# Altium PCB PCB1.PcbDoc
Units mil, origin at the board's own origin, x right, y up, seen from the top; angles counter-clockwise.
Board outline 6000 x 4000 mil, 2 copper layers (Top Layer, Bottom Layer); 60 components, 38 nets, 155 pads, 0 vias.
Unrouted connection lines stored in the file: 1.
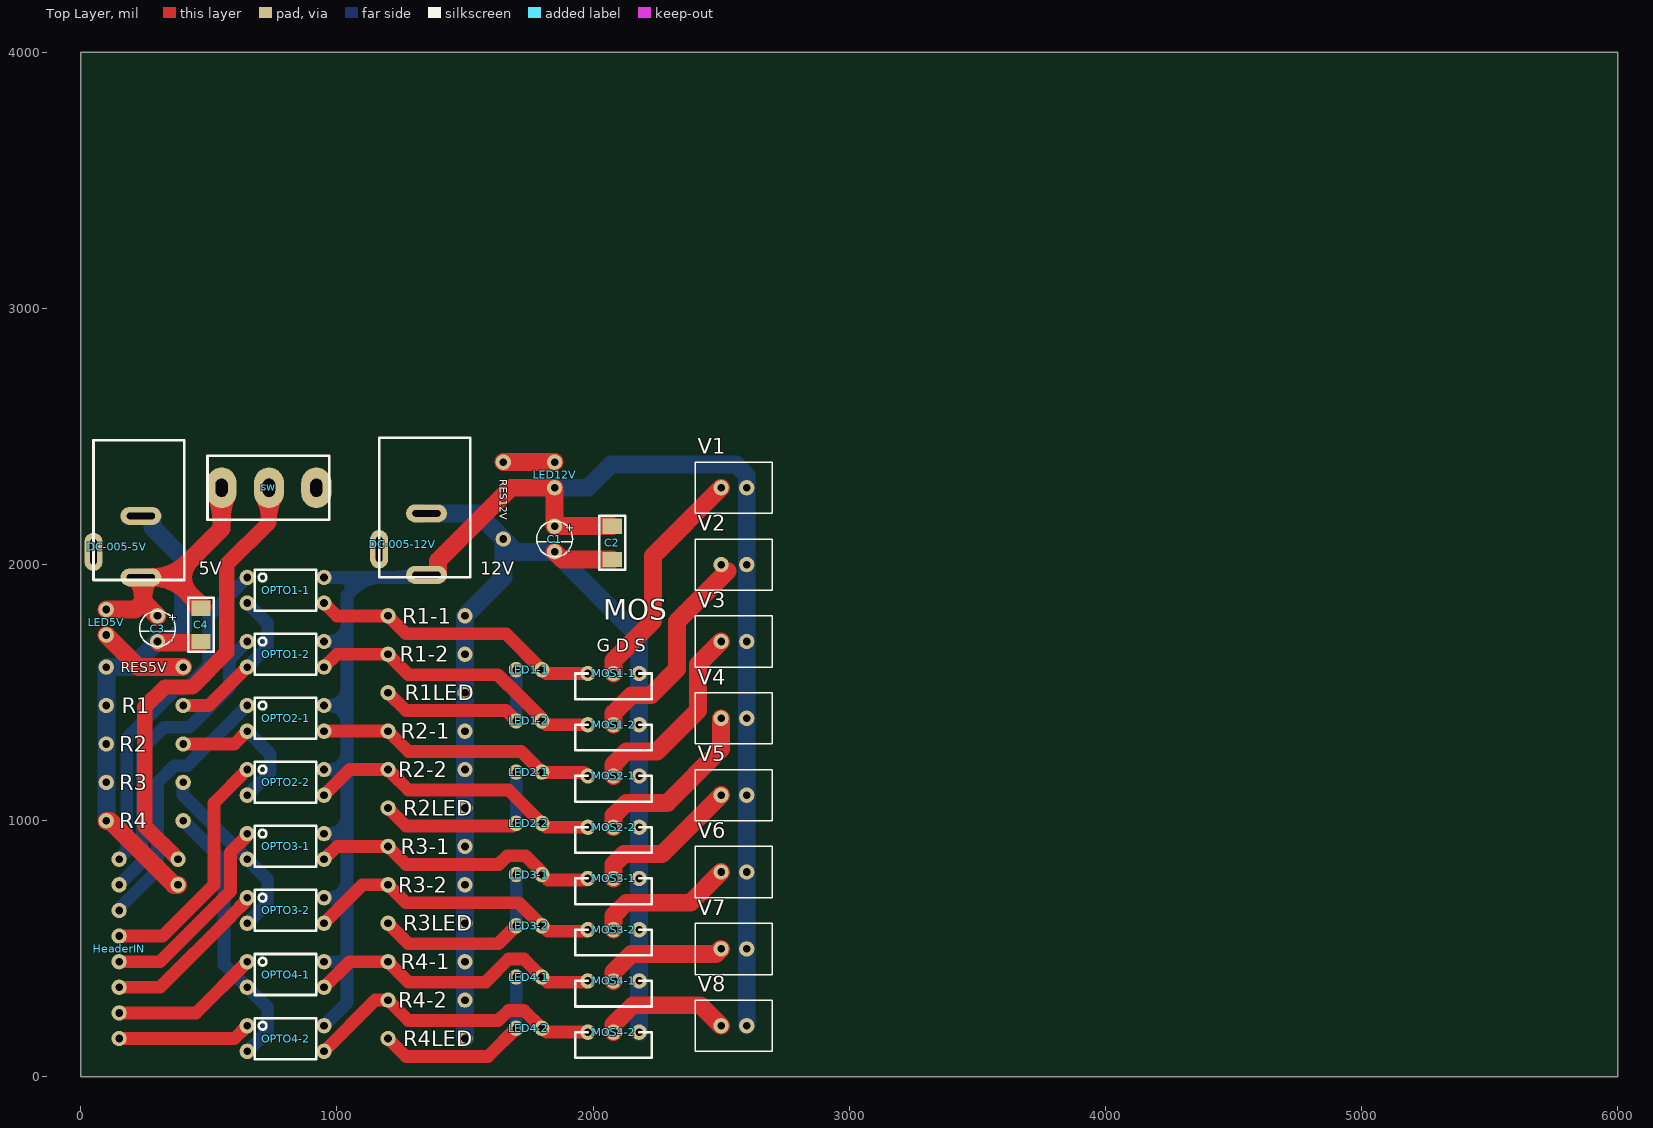
[diagram p0: Top Layer view]
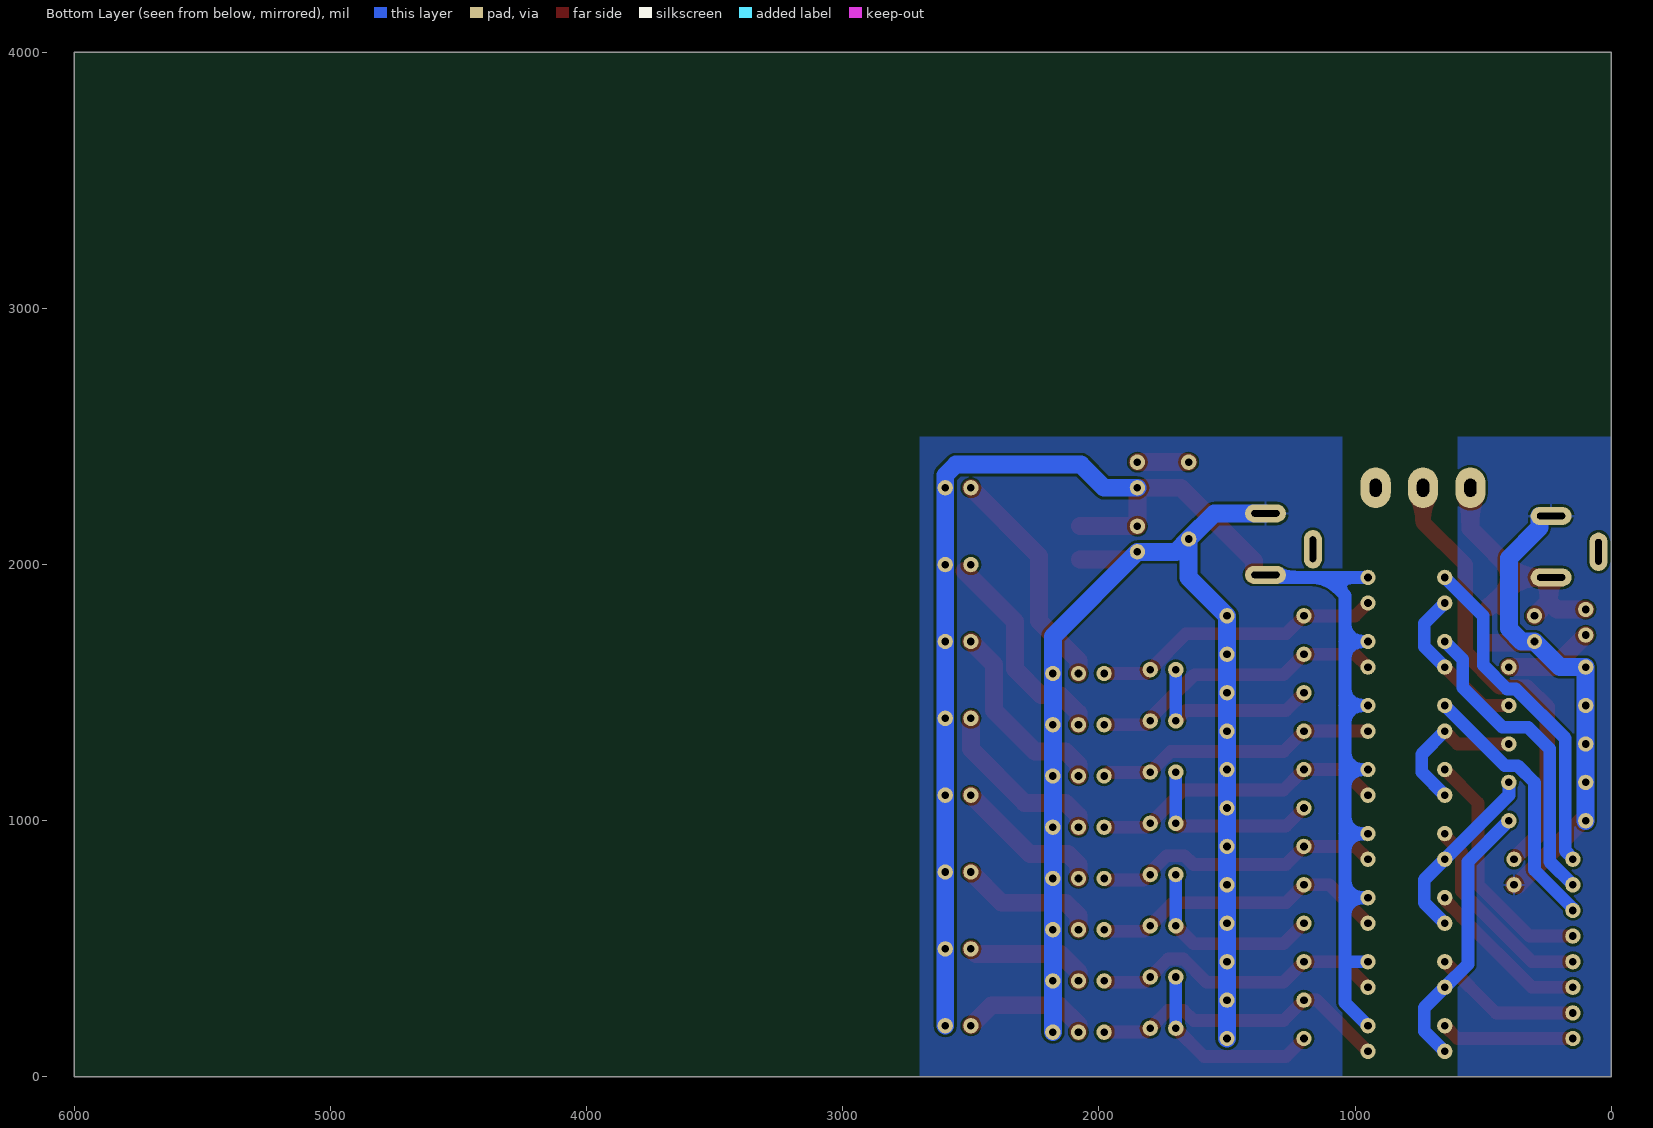
[diagram p1: Bottom Layer view, seen from below]

## Layer stack, top to bottom
Top Solder: solder mask 0.4, Solder Resist, Dk 3.5
Top Layer: signal copper 1.4
Dielectric 1: dielectric 12.6, FR-4, Dk 4.8
Bottom Layer: signal copper 1.4
Bottom Solder: solder mask 0.4, Solder Resist, Dk 3.5

## Board outline
0,0 6000,0 6000,4000 0,4000

## Design rules (kind name [scope] priority, off if disabled: settings)
Clearance [All] p1: gap=10 ignorepadtopadclearanceinfootprint=FALSE except(0: Arc-Hole Track-Hole SMDPad-Hole THPad-Hole Via-Hole Fill-Hole Poly-Hole Region-Hole Text-Hole)
PolygonConnect [All] p1: connectstyle=Relief reliefconductorwidth=10 reliefentries=4 polygonreliefangle="90 Angle" airgapwidth=10
RoutingVias [All] p1: holewidth=28 width=50 viastyle="Through Hole" minholewidth=28 minwidth=50 maxholewidth=28 maxwidth=50
SolderMaskExpansion [All] p1: expansion=4 istentingtop=FALSE
Width [All] p1: maxlimit=100 minlimit=10 preferedwidth=50 minimp=50.000000 maximp=50.000000 favimp=50.000000
30 further rules are at their usual default settings.

## Components (designator, comment, footprint, x,y, rotation, side; value= is the part's Value field where it differs from the comment)
C1 "C-po" CAP1 1850,2150 r270 top
C2 "C" CAP2 2125,2190 r270 top
C3 "C-po" CAP1 300,1800 r270 top
C4 "C" CAP2 520,1870 r270 top
DC-005-5V "电源插头" DC-005 50,2485 r270 top
DC-005-12V "电源插头" DC-005 1165,2495 r270 top
HeaderIN "Header" HEADER 150,850 r0 top
LED1-1 "LED" LED 1800,1590 r180 top
LED1-2 "LED" LED 1800,1390 r180 top
LED2-1 "LED" LED 1800,1190 r180 top
LED2-2 "LED" LED 1800,990 r180 top
LED3-1 "LED" LED 1800,790 r180 top
LED3-2 "LED" LED 1800,590 r180 top
LED4-1 "LED" LED 1800,390 r180 top
LED4-2 "LED" LED 1800,190 r180 top
LED5V "LED" LED 100,1825 r270 top
LED12V "LED" LED 1850,2300 r90 top
MOS1-1 "IRF3205" MOS 1980,1575 r0 top
MOS1-2 "IRF3205" MOS 1980,1375 r0 top
MOS2-1 "IRF3205" MOS 1980,1175 r0 top
MOS2-2 "IRF3205" MOS 1980,975 r0 top
MOS3-1 "IRF3205" MOS 1980,775 r0 top
MOS3-2 "IRF3205" MOS 1980,575 r0 top
MOS4-1 "IRF3205" MOS 1980,375 r0 top
MOS4-2 "IRF3205" MOS 1980,175 r0 top
OPTO1-1 "PC817" PC817 650,1950 r0 top
OPTO1-2 "PC817" PC817 650,1700 r0 top
OPTO2-1 "PC817" PC817 650,1450 r0 top
OPTO2-2 "PC817" PC817 650,1200 r0 top
OPTO3-1 "PC817" PC817 650,950 r0 top
OPTO3-2 "PC817" PC817 650,700 r0 top
OPTO4-1 "PC817" PC817 650,450 r0 top
OPTO4-2 "PC817" PC817 650,200 r0 top
R1 "RES" RES 100,1450 r0 top
R1-1 "RES" RES 1200,1800 r0 top
R1-2 "RES" RES 1200,1650 r0 top
R1LED "RES" RES 1200,1500 r0 top
R2 "RES" RES 100,1300 r0 top
R2-1 "RES" RES 1200,1350 r0 top
R2-2 "RES" RES 1200,1200 r0 top
R2LED "RES" RES 1200,1050 r0 top
R3 "RES" RES 100,1150 r0 top
R3-1 "RES" RES 1200,900 r0 top
R3-2 "RES" RES 1200,750 r0 top
R3LED "RES" RES 1200,600 r0 top
R4 "RES" RES 100,1000 r0 top
R4-1 "RES" RES 1200,450 r0 top
R4-2 "RES" RES 1200,300 r0 top
R4LED "RES" RES 1200,150 r0 top
RES5V "RES" RES 400,1600 r180 top
RES12V "RES" RES 1650,2400 r270 top
sw "powSwitch" POWSWITCH 920,2300 r90 top
V1 "ValveHeader" VALVEHEADER 2600,2300 r180 top
V2 "ValveHeader" VALVEHEADER 2600,2000 r180 top
V3 "ValveHeader" VALVEHEADER 2600,1700 r180 top
V4 "ValveHeader" VALVEHEADER 2600,1400 r180 top
V5 "ValveHeader" VALVEHEADER 2600,1100 r180 top
V6 "ValveHeader" VALVEHEADER 2600,800 r180 top
V7 "ValveHeader" VALVEHEADER 2600,500 r180 top
V8 "ValveHeader" VALVEHEADER 2600,200 r180 top

## Footprints (in the part's own frame and the unit in brackets; to place one, negate y for a bottom-side part, rotate by r counter-clockwise, add the part's x,y. Pads: shape width x height; smd on the part's side, far side on the other; paste and mask are expansions set on the pad)
CAP1 [mil]
  round 60 hole 30: C+(0,0) C-(100,0)
  silkscreen extent -20,-70 120,70
CAP2 [mil]
  rect 60x75 smd: C1(40,-50) C2(170,-50)
  silkscreen extent 0,-100 210,0
DC-005 [mil] "电源插头"
  oval 150x70 hole 25 slot 100 at 0 deg: none(435,0)
  oval 70x160 hole 25 slot 110 at 90 deg: V+(535,185) V-(295,185)
  silkscreen extent 0,0 545,355
HEADER [mil]
  round 60 hole 30: 1(0,0) 2(0,-100) 3(0,-200) 4(0,-300) 5(0,-400) 6(0,-500) 7(0,-600) 8(0,-700)
LED [mil]
  round 60 hole 30: 1(0,0) 2(100,0)
MOS [mil]
  round 60 hole 30: D(100,0) G(0,0) S(200,0)
  silkscreen extent -50,-100 250,0
PC817 [mil]
  round 60 hole 30: 1(0,0) 2(0,-100) 3(300,0) 4(300,-100)
  silkscreen extent 30,-130 270,30
POWSWITCH [mm]
  oval 4x3 hole 1.2 slot 1.8 at 0 deg: IN+(0,9.398) IN-(0,4.699) none(0,0)
  silkscreen extent -3.18,-1.27 3.17,10.79
RES [mil]
  round 60 hole 30: R1(0,0) R2(300,0)
VALVEHEADER [mil]
  round 60 hole 30: +(0,0) -(100,0)
  silkscreen extent -100,-100 200,100

## Part data
DC-005-5V DC-005-12V: library part DC-005

## Free pads (board coordinates)
  round 60 hole 30: 2(380,850) 3(380,750)

## Nets (pads, with @x,y where several pads share a name; then routed paths per layer and width w, separated by ;. In a path a pad name is that pad's centre, name@x,y a point inside that pad or via, vN(x,y) a via of type N, cw(c..) or ccw(c..) an arc to the next point about the centre after c; other vN are vias at no path point)
+5: pad.2 sw.IN- | length 1767.5
  Top Layer w60: pad.2 250,980 250,1444 328.5,1522.5 435.64,1522.5 570,1656.86 570,2000 735,2165 sw.IN-
+12: C1.C+ C2.C1 DC-005-12V.V+ LED12V.1 OPTO1-1.3 OPTO1-2.3 OPTO2-1.3 OPTO2-2.3 OPTO3-1.3 OPTO3-2.3 OPTO4-1.3 OPTO4-2.3 V1.+ V2.+ V3.+ V4.+ V5.+ V6.+ V7.+ V8.+ | length 6751.7
  Top Layer w70: DC-005-12V.V+ 1395,1960 1395,2015 1680,2300 LED12V.1 C1.C+ C2.C1
  Bottom Layer w50: OPTO4-2.3 1040,290 1040,700 ; OPTO4-1.3 1030,450 ; OPTO3-2.3 1040,700 ; OPTO3-1.3 1040,950 ; OPTO2-2.3 1040,1200 ; OPTO2-1.3 1040,1450 ; OPTO1-2.3 1040,1700 ; OPTO1-1.3 1110,1950 ; DC-005-12V.V+ 1299.59,1960 1289.59,1950 1110,1950 ; 1040,700 1040,950 ; 1040,950 1040,1200 ; 1040,1200 1040,1450 ; 1040,1450 1040,1700 ; 1040,1700 1040,1880 1110,1950
  Bottom Layer w70: LED12V.1 1980,2300 2070,2390 2558.99,2390 2600,2348.99 V1.+ V2.+ V3.+ V4.+ V5.+ V8.+
GND: C1.C- C2.C2 C3.C- C4.C2 DC-005-5V.V- DC-005-12V.V- MOS1-1.S MOS1-2.S MOS2-1.S MOS2-2.S MOS3-1.S MOS3-2.S MOS4-1.S MOS4-2.S pad.3 R1-1.R2 R1-2.R2 R1.R1 R1LED.R2 R2-1.R2 R2-2.R2 R2.R1 R2LED.R2 R3-1.R2 R3-2.R2 R3.R1 R3LED.R2 R4-1.R2 R4-2.R2 R4.R1 R4LED.R2 RES5V.R2 RES12V.R2 | length 6868.8
  Top Layer w70: R4.R1 115,1000 365,750 pad.3 ; C3.C-@305,1695 C4.C2@470,1695 ; C1.C- 1880,2020 C2.C2
  Bottom Layer w70: R4.R1 R3.R1 R2.R1 R1.R1 RES5V.R2 200,1600 C3.C- 350,1700 400,1750 400,2025 280,2145 280,2190 DC-005-5V.V- ; DC-005-12V.V- 1550,2200 RES12V.R2 ; R4LED.R2 R4-2.R2 R4-1.R2 R3LED.R2 R3-2.R2 R3-1.R2 R2LED.R2 R2-2.R2 R2-1.R2 R1LED.R2 R1-2.R2 R1-1.R2 1650,1950 RES12V.R2 ; MOS4-2.S MOS4-1.S MOS3-2.S MOS3-1.S MOS2-2.S MOS2-1.S MOS1-2.S MOS1-1.S 2180,1720 C1.C- 1700,2050 RES12V.R2
I1: HeaderIN.1 OPTO1-1.1 | length 1326.9
  Bottom Layer w50: HeaderIN.1 150,852.71 180,882.71 180,1321.92 373.08,1515 406.92,1515 500,1608.08 500,1800 OPTO1-1.1
I2: HeaderIN.2 OPTO1-2.1 | length 1215.7
  Bottom Layer w50: HeaderIN.2 240,840 240,1280 325,1365 425,1365 580,1520 580,1630 OPTO1-2.1
I3: HeaderIN.3 OPTO2-1.1 | length 1036.4
  Bottom Layer w50: HeaderIN.3 151.91,651.91 151.91,659.99 300,808.08 300,1150 365,1215 415,1215 OPTO2-1.1
I4: HeaderIN.4 OPTO2-2.1 | length 956.7
  Top Layer w50: HeaderIN.4 320,550 520,750 520,1070 OPTO2-2.1
I5: HeaderIN.5 OPTO3-1.1 | length 800.8
  Top Layer w50: HeaderIN.5 310,450 585,725 585,876.92 648.09,940.01 648.09,948.09 OPTO3-1.1
I6: HeaderIN.6 OPTO3-2.1 | length 650.8
  Top Layer w50: HeaderIN.6 310,350 585,625 585,626.92 648.09,690.01 648.09,698.09 OPTO3-2.1
I7: HeaderIN.7 OPTO4-1.1 | length 582.8
  Top Layer w50: HeaderIN.7 450,250 OPTO4-1.1
I8: HeaderIN.8 OPTO4-2.1 | length 520.7
  Top Layer w50: HeaderIN.8 600,150 OPTO4-2.1
NetC3_C+: C3.C+ C4.C1 DC-005-5V.V+ LED5V.1 sw.IN+ | length 1046.4
  Top Layer w70: LED5V.1 212.99,1825 243.99,1856.01 ; DC-005-5V.V+ DC-005-5V.V+@243.99,1950 ; C3.C+ 243.99,1856.01 ; C4.C1@475,1835 360,1950 ; sw.IN+ 550,2140 360,1950 ; 243.99,1856.01 DC-005-5V.V+@243.99,1950 ; DC-005-5V.V+@243.99,1950 360,1950
NetLED1-1_1: LED1-1.1 MOS1-1.G OPTO1-1.4 R1-1.R1 | length 1140.8
  Top Layer w50: OPTO1-1.4 1000,1800 R1-1.R1 1270,1730 1660,1730 LED1-1.1 ; LED1-1.1@1802.36,1588.09 1804.62,1588.09 1817.71,1575 MOS1-1.G
NetLED1-1_2: LED1-1.2 LED1-2.2 R1LED.R1 | length 745.6
  Top Layer w50: R1LED.R1 1270,1430 1660,1430 LED1-2.2
  Bottom Layer w50: LED1-2.2 LED1-1.2
NetLED1-2_1: LED1-2.1 MOS1-2.G OPTO1-2.4 R1-2.R1 | length 1165.9
  Top Layer w50: OPTO1-2.4 1000,1650 R1-2.R1@1195.38,1650 ; R1-2.R1 1280,1570 1628.08,1570 1673.08,1525 1675,1525 1798.09,1401.91 1798.09,1391.91 LED1-2.1 1802.71,1390 1817.71,1375 MOS1-2.G
NetLED2-1_1: LED2-1.1 MOS2-1.G OPTO2-1.4 R2-1.R1 | length 1102.8
  Top Layer w50: OPTO2-1.4 R2-1.R1@1204.62,1350 ; R2-1.R1 1280,1270 1720,1270 LED2-1.1 ; LED2-1.1@1800.79,1188.09 1964.21,1188.09 MOS2-1.G@1977.29,1175
NetLED2-1_2: LED2-1.2 LED2-2.2 R2LED.R1 | length 733.1
  Top Layer w50: R2LED.R1 1270,980 1687.29,980 1697.29,990 LED2-2.2
  Bottom Layer w50: LED2-2.2 LED2-1.2
NetLED2-2_1: LED2-2.1 MOS2-2.G OPTO2-2.4 R2-2.R1 | length 1163
  Top Layer w50: OPTO2-2.4 1050,1200 R2-2.R1 1214.3,1185.7 1280,1120 1670,1120 LED2-2.1 ; LED2-2.1@1800.79,988.09 1804.62,988.09 1817.71,975 MOS2-2.G
NetLED3-1_1: LED3-1.1 MOS3-1.G OPTO3-1.4 R3-1.R1 | length 1133.4
  Top Layer w50: OPTO3-1.4 1000,900 R3-1.R1@1196.43,900 ; R3-1.R1 1270,830 1631.92,830 1665.61,863.68 1736.32,863.68 1798.09,801.91 1798.09,791.91 LED3-1.1 ; LED3-1.1@1800.79,788.09 1804.62,788.09 1823.71,769 1971.29,769 MOS3-1.G@1977.29,775
NetLED3-1_2: LED3-1.2 LED3-2.2 R3LED.R1 | length 762.1
  Top Layer w50: R3LED.R1 1280,520 1630,520 LED3-2.2
  Bottom Layer w50: LED3-2.2 LED3-1.2
NetLED3-2_1: LED3-2.1 MOS3-2.G OPTO3-2.4 R3-2.R1 | length 1162.3
  Top Layer w50: OPTO3-2.4 1100,750 R3-2.R1@1200.81,750 ; R3-2.R1 1270,680 1710,680 LED3-2.1 ; LED3-2.1@1804.62,588.09 1823.71,569 1971.29,569 MOS3-2.G@1977.29,575
NetLED4-1_1: LED4-1.1 MOS4-1.G OPTO4-1.4 R4-1.R1 | length 1178.6
  Top Layer w50: OPTO4-1.4 1050,450 R4-1.R1@1204.62,450 ; R4-1.R1 1280,370 1580,370 1670,460 1730,460 LED4-1.1 ; LED4-1.1@1803.68,388.09 1804.62,388.09 1822.71,370 1972.29,370 MOS4-1.G@1977.29,375
NetLED4-1_2: LED4-1.2 LED4-2.2 R4LED.R1 | length 774.6
  Top Layer w50: R4LED.R1 1270,80 1590,80 LED4-2.2
  Bottom Layer w50: LED4-2.2 LED4-1.2
NetLED4-2_1: LED4-2.1 MOS4-2.G OPTO4-2.4 R4-2.R1 | length 1192.9
  Top Layer w50: OPTO4-2.4 1150,300 R4-2.R1 1280,220 1630,220 1670,260 1730,260 LED4-2.1 ; LED4-2.1@1804.07,188.09 1804.62,188.09 1817.71,175 MOS4-2.G
NetLED5V_2: LED5V.2 RES5V.R1 | length 351.8
  Top Layer w70: LED5V.2 225,1600 RES5V.R1
NetLED12V_2: LED12V.2 RES12V.R1 | length 200
  Top Layer w70: RES12V.R1 LED12V.2
NetOPTO1-1_2: OPTO1-1.2 OPTO1-2.2 R1.R2 | length 628.4
  Top Layer w50: R1.R2 500,1450 OPTO1-2.2
  Bottom Layer w50: OPTO1-2.2 730,1680 730,1770 OPTO1-1.2
NetOPTO2-1_2: OPTO2-1.2 OPTO2-2.2 R2.R2 | length 595.3
  Top Layer w50: R2.R2 600,1300 OPTO2-1.2
  Bottom Layer w50: OPTO2-2.2 740,1190 740,1260 OPTO2-1.2
NetOPTO3-1_2: OPTO3-1.2 OPTO3-2.2 R3.R2 | length 719.8
  Bottom Layer w50: R3.R2 400,1100 OPTO3-1.2 730,770 730,680 OPTO3-2.2
NetOPTO4-1_2: OPTO4-1.2 OPTO4-2.2 R4.R2 | length 1069.8
  Bottom Layer w50: R4.R2 560,840 560,440 OPTO4-1.2 730,270 730,180 OPTO4-2.2
O1: MOS1-1.D V1.- | length 899
  Top Layer w70: MOS1-1.D 2080,1626 2234,1780 2234,2034 V1.-
O2: MOS1-2.D V2.- | length 828.8
  Top Layer w70: MOS1-2.D 2080,1420 2150,1490 2226,1490 2328,1592 2328,1778 2525,1975
O3: MOS2-1.D V3.- | length 769.3
  Top Layer w70: MOS2-1.D 2080,1220 2130,1270 2250,1270 2410,1430 2410,1610 V3.-
O4: MOS2-2.D V4.- | length 692.7
  Top Layer w70: MOS2-2.D 2080,1020 2130,1070 2290,1070 2500,1280 V4.-
O5: MOS3-1.D V5.- | length 586.2
  Top Layer w70: MOS3-1.D 2080,828.99 2121.01,870 2270,870 V5.-
O6: MOS3-2.D V6.- | length 545.4
  Top Layer w70: MOS3-2.D 2080,630 2130,680 2380,680 V6.-
O7: MOS4-1.D V7.- | length 492.3
  Top Layer w70: MOS4-1.D 2080,410 2150,480 2480,480 V7.-
O8: MOS4-2.D V8.- | length 514.2
  Top Layer w70: MOS4-2.D 2080,205 2155,280 2420,280 V8.-
pads on no net: DC-005-5V.none DC-005-12V.none sw.none

## Polygon pours and split planes (outlines as drawn)
GND on Bottom Layer "GND_L02_P-001" (solid, remove dead copper, pour order 0): 1050,2500 1050,0 2700,0 2700,2500
GND on Bottom Layer "GND_L02_P-001" (solid, remove dead copper, pour order 2): 0,2500 600,2500 600,0 0,0

## Silkscreen, mask and mechanical layers (free items; w line width, h text height)
Top Overlay:
  text "5V" at 460,1960 h50
  text "12V" at 1560,1960 h50
  text "MOS" at 2040,1785 h80
  text "G D S" at 2015,1660 h50
Mechanical 1:
  lines w20: 0,100 0,2500 2600,2500 2700,2400 2700,100 2600,0 100,0 0,100

## Text inside footprints (layer, text, board x,y; h text height)
C1: Top Overlay "+" at 1895,2160 h30 r270; Top Overlay "-" at 1895,2060 h30 r270
C3: Top Overlay "+" at 345,1810 h30 r270; Top Overlay "-" at 345,1710 h30 r270